# Altium PCB RPi Stepper Hat V1.1 PcbDoc.PcbDoc
Units mm, origin at the board's own origin, x right, y up, seen from the top; angles counter-clockwise.
Board outline 139 x 57 mm, 2 copper layers (Top Layer, Bottom Layer); 30 components, 21 nets, 134 pads, 22 vias.
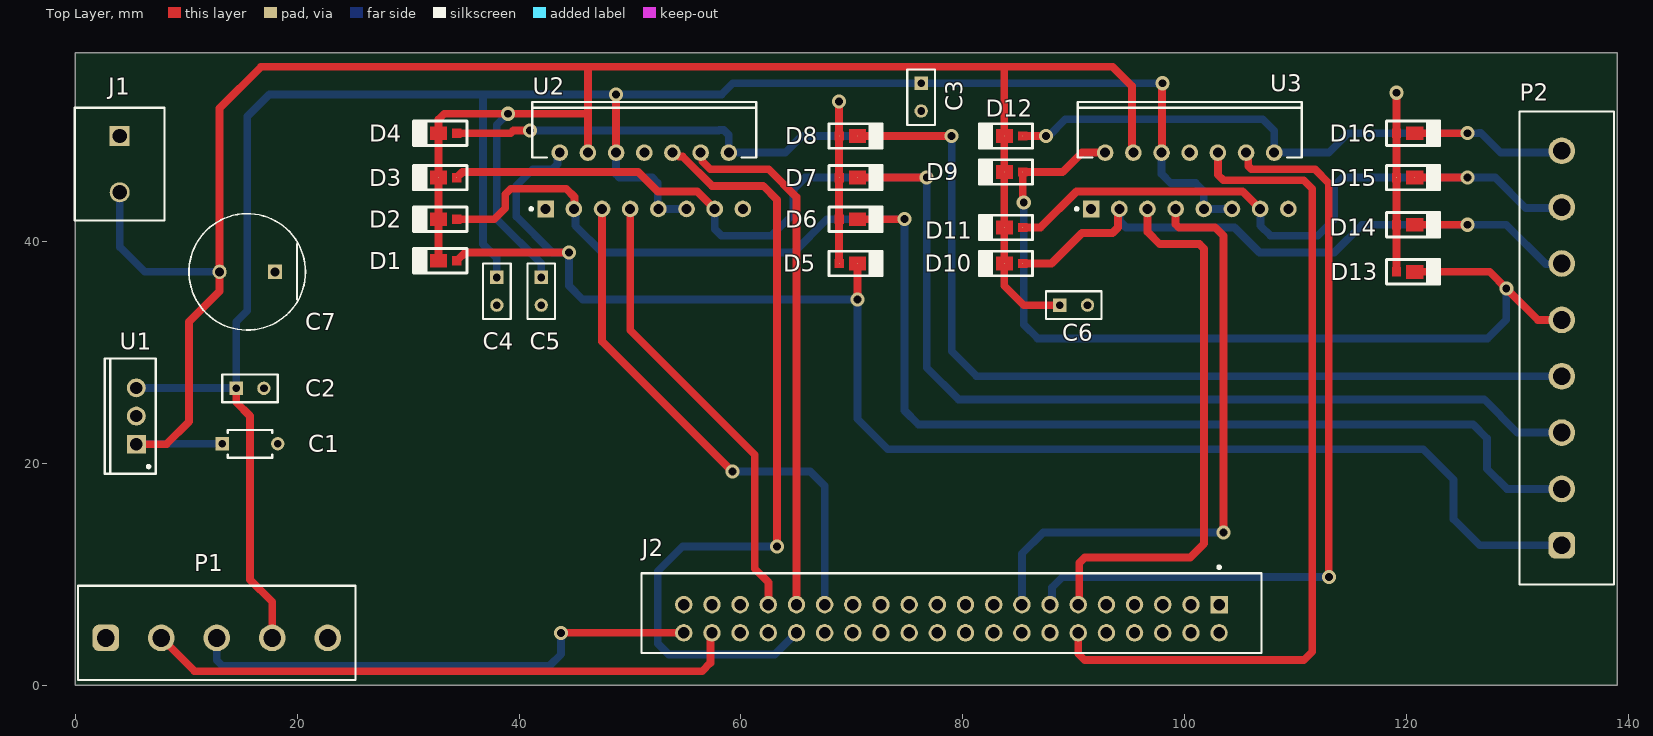
[diagram p0: Top Layer view]
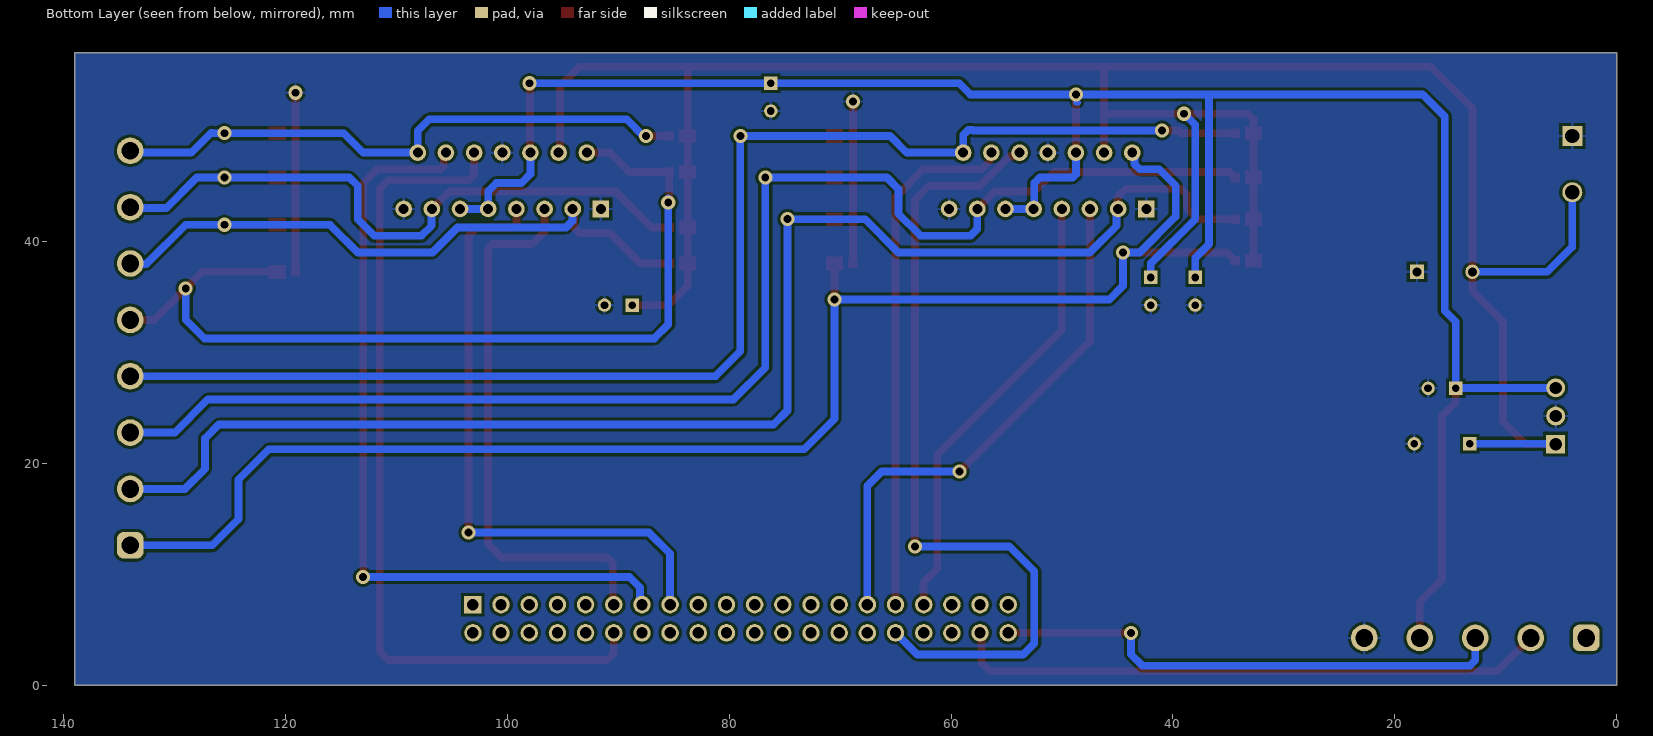
[diagram p1: Bottom Layer view, seen from below]

## Layer stack, top to bottom
Top Solder: solder mask 0.0102, Solder Resist, Dk 3.5
Top Layer: signal copper 0.0356
Dielectric 1: dielectric 0.32, FR-4, Dk 4.8
Bottom Layer: signal copper 0.0356
Bottom Solder: solder mask 0.0102, Solder Resist, Dk 3.5

## Board outline
0,0 139,0 139,57 0,57

## Design rules (kind name [scope] priority, off if disabled: settings)
Clearance [All] p1: gap=0.254 ignorepadtopadclearanceinfootprint=FALSE except(0: Arc-Hole Track-Hole SMDPad-Hole THPad-Hole Via-Hole Fill-Hole Poly-Hole Region-Hole Text-Hole)
PolygonConnect [All] p1: connectstyle=Relief reliefconductorwidth=0.254 reliefentries=4 polygonreliefangle="90 Angle" airgapwidth=0.254
RoutingVias [All] p1: holewidth=0.711 width=1.27 viastyle="Through Hole" minholewidth=0.711 minwidth=1.27 maxholewidth=0.711 maxwidth=1.27
SolderMaskExpansion [All] p1: expansion=0.102 istentingtop=FALSE
Width [All] p1: maxlimit=1 minlimit=0.3 preferedwidth=0.5
30 further rules are at their usual default settings.

## Components (designator, comment, footprint, x,y, rotation, side; value= is the part's Value field where it differs from the comment)
C1 "220n" FP-RCE1K1-2_5-MFG 15.75,21.75 r0 top
C2 "100n" FP-RDE0P1-MFG 15.75,26.75 r0 top
C3 "100n" FP-RDE0P1-MFG 76.25,53 r270 top
C4 "100n" FP-RDE0P1-MFG 38,35.5 r270 top
C5 "100n" FP-RDE0P1-MFG 42,35.5 r270 top
C6 "100n" FP-RDE0P1-MFG 90,34.25 r0 top
C7 "220u" FP-RAD-TH-D_10_0_5-L_25_2-MFG 15.5,37.25 r180 top
D1 "RFN2VWM2STR" RFN2VWM2STR 34.8,38.65 r180 top
D2 "RFN2VWM2STR" RFN2VWM2STR 34.8,42.4 r180 top
D3 "RFN2VWM2STR" RFN2VWM2STR 34.8,46.15 r180 top
D4 "RFN2VWM2STR" RFN2VWM2STR 34.8,50.15 r180 top
D5 "RFN2VWM2STR" RFN2VWM2STR 68.45,37.6 r0 top
D6 "RFN2VWM2STR" RFN2VWM2STR 68.45,41.6 r0 top
D7 "RFN2VWM2STR" RFN2VWM2STR 68.45,45.35 r0 top
D8 "RFN2VWM2STR" RFN2VWM2STR 68.45,49.1 r0 top
D9 "RFN2VWM2STR" RFN2VWM2STR 85.8,46.65 r180 top
D10 "RFN2VWM2STR" RFN2VWM2STR 85.8,38.4 r180 top
D11 "RFN2VWM2STR" RFN2VWM2STR 85.8,41.65 r180 top
D12 "RFN2VWM2STR" RFN2VWM2STR 85.8,49.9 r180 top
D13 "RFN2VWM2STR" RFN2VWM2STR 118.7,36.85 r0 top
D14 "RFN2VWM2STR" RFN2VWM2STR 118.7,41.1 r0 top
D15 "RFN2VWM2STR" RFN2VWM2STR 118.7,45.35 r0 top
D16 "RFN2VWM2STR" RFN2VWM2STR 118.7,49.35 r0 top
J1 "1729128" PHOE-1729128-2_V 4,46.96 r270 top
J2 "SFH11-PBPC-D20-ST-BK" FP-SFH11-PBPC-D20-ST-BK-MFG 78.98,6.48 r180 top
P1 "691311700005" 691311700005 12.75,4.7 r0 top
P2 "691311500108" 691311500108 134.45,30.38 r90 top
U1 "L7805CV" TO220 5.5,24.25 r90 top
U2 "L298N" STM-FM-15 51.29,45.46 r90 top
U3 "L298N" STM-FM-15 100.46,45.46 r90 top

## Footprints (in the part's own frame and the unit in brackets; to place one, negate y for a bottom-side part, rotate by r counter-clockwise, add the part's x,y. Pads: shape width x height; smd on the part's side, far side on the other; paste and mask are expansions set on the pad)
691311500108 [mm] "5,08mm - PCB Headers - Vertical - Closed ends -08p"
  rrect50% 2.4x2.4 hole 1.6: 1(-17.78,0.45)
  round 2.4 hole 1.6: 2(-12.7,0.45) 3(-7.62,0.45) 4(-2.54,0.45) 5(2.54,0.45) 6(7.62,0.45) 7(12.7,0.45) 8(17.78,0.45)
  silkscreen extent -21.32,-4.25 21.32,4.25, body extent -21.32,-4.25 21.32,4.25, height 12.05
691311700005 [mm] "5.00mm - Open Vertical PCB Header - 05p"
  rrect50% 2.4x2.4 hole 1.6: 1(-10,-0.45)
  round 2.4 hole 1.6: 2(-5,-0.45) 3(0,-0.45) 4(5,-0.45) 5(10,-0.45)
  silkscreen extent -12.5,-4.25 12.5,4.25, body extent -12.5,-4.25 12.5,4.25, height 12.1
FP-RAD-TH-D_10_0_5-L_25_2-MFG [mm]
  rect 1.3x1.3 hole 0.8 paste-1000 mask+0: 1(-2.5,0)
  round 1.3 hole 0.8 paste-1000 mask+0: 2(2.5,0)
  silkscreen extent -5.25,-5.25 5.25,5.25, body extent -5.35,-5.35 5.35,5.35, height 0.25
FP-RCE1K1-2_5-MFG [mm]
  rect 1.2x1.2 hole 0.7 paste-1000 mask+0: 1(-2.5,0)
  round 1.2 hole 0.7 paste-1000 mask+0: 2(2.5,0)
  silkscreen extent -2,-1.25 2,1.25, body extent -3.2,-1.35 3.2,1.35, height 0.25
FP-RDE0P1-MFG [mm]
  rect 1.2x1.2 hole 0.7 paste-1000 mask+0: 1(-1.25,0)
  round 1.2 hole 0.7 paste-1000 mask+0: 2(1.25,0)
  silkscreen extent -2.5,-1.25 2.5,1.25, body extent -2.6,-1.35 2.6,1.35, height 0.25
FP-SFH11-PBPC-D20-ST-BK-MFG [mm]
  rect 1.57x1.57 hole 1.02 paste-1000 mask+0: 1(-24.13,-0.77)
  round 1.57 hole 1.02 paste-1000 mask+0: 2(-24.13,1.77) 3(-21.59,-0.77) 4(-21.59,1.77) 5(-19.05,-0.77) 6(-19.05,1.77) 7(-16.51,-0.77) 8(-16.51,1.77) 9(-13.97,-0.77) 10(-13.97,1.77) 11(-11.43,-0.77) 12(-11.43,1.77) 13(-8.89,-0.77) 14(-8.89,1.77) 15(-6.35,-0.77) 16(-6.35,1.77) 17(-3.81,-0.77) 18(-3.81,1.77) 19(-1.27,-0.77) 20(-1.27,1.77) 21(1.27,-0.77) 22(1.27,1.77) 23(3.81,-0.77) 24(3.81,1.77) 25(6.35,-0.77) 26(6.35,1.77) 27(8.89,-0.77) 28(8.89,1.77) 29(11.43,-0.77) 30(11.43,1.77) 31(13.97,-0.77) 32(13.97,1.77) 33(16.51,-0.77) 34(16.51,1.77) 35(19.05,-0.77) 36(19.05,1.77) 37(21.59,-0.77) 38(21.59,1.77) 39(24.13,-0.77) 40(24.13,1.77)
  silkscreen extent -27.94,-4.27 27.94,3.6, body extent -27.86,-3.55 27.86,3.55, height 8.7
PHOE-1729128-2_V [mm] "Receptacle, 2-Leads, Body 8.1x10.16mm, Pitch 5.08mm"
  rect 1.8x1.8 hole 1.3: 1(-2.54,0)
  round 1.8 hole 1.3: 2(2.54,0)
  silkscreen extent -5.08,-4.05 5.08,4.05, body extent -5.65,-4.05 5.08,4.05, height 10.01
RFN2VWM2STR [mm]
  round 0.025 smd: A(0.4,0.4) K(2.05,0.4)
  Top Layer region: 1.3,1 1.3,-0.2 2.8,-0.2 2.8,1
  Top Layer region: 0,0.8 0.8,0.8 0.8,0 0,0
  silkscreen extent -0.5,-0.7 4.3,1.5
STM-FM-15 [mm] "FM, 15-Leads, Body 20.2x5mm, Pitch 1.27mm"
  rect 1.5x1.5 hole 0.9: 1(-2.54,8.89)
  round 1.5 hole 0.9: 2(2.54,7.62) 3(-2.54,6.35) 4(2.54,5.08) 5(-2.54,3.81) 6(2.54,2.54) 7(-2.54,1.27) 8(2.54,0) 9(-2.54,-1.27) 10(2.54,-2.54) 11(-2.54,-3.81) 12(2.54,-5.08) 13(-2.54,-6.35) 14(2.54,-7.62) 15(-2.54,-8.89)
  silkscreen extent -2.66,-10.1 7.09,10.31, body extent -2.8,-10.1 7.09,10.1, height 21
TO220 [mm] "TO, Thru-Hole, Vertical, Heatsink Mounted; 3 In-Line Leads; Pitch 2.54 mm"
  rect 1.7x1.7 hole 1.1: 1(-2.54,0)
  round 1.7 hole 1.1: 2(0,0) 3(2.54,0)
  silkscreen extent -5.2,-1.75 5.2,2.85, body extent -5.25,-1.8 5.25,2.9, height 19.7

## Part data
C1: library part CMP-06035-036150-1, "Cap Ceramic Monolithic 220nF 50V 10% Thru-Hole Bulk RCER71H224K1M1H03A", Capacitance=220nF, Case/Package=Radial, Dielectric=X7R, Max Operating Temperature=125°C, Min Operating Temperature=-55°C, Package Quantity=1, Ratings=AEC-Q200, Resistor Type=Ceramic, Tolerance=10%, Voltage Rating=50V, Height=3.5mm, Height - Seated (Max)=0.138inch, Lead Diameter=0.5mm, Lead Pitch=0.197inch, Lead/Base Style="Formed Leads", Length=0.157inch, Mount="Through Hole", Packaging="Tape and Reel", Termination=Radial, Voltage Rating (DC)=50V, Width=0.098inch
C2 C3 C4 C5 C6: library part CMP-06035-046728-1, "Ceramic Capacitor 100nF ±10% 25V X7R Radial RDER71E104K0S1H03A", Capacitance=100nF, Case/Package=Radial, Dielectric=X7R, Max Operating Temperature=125°C, Min Operating Temperature=-55°C, Package Quantity=2000, Resistor Type=Ceramic, Tolerance=10%, Voltage Rating=25V, Height=3.5mm, Height - Seated (Max)=0.236inch, Lead Diameter=0.5mm, Lead Free="Lead Free", Lead Pitch=0.098inch, Length=0.197inch, Mount="Through Hole", Packaging="Tape and Reel", Termination=Radial, Voltage Rating (DC)=25V, Width=3.5mm
C7: library part CMP-05427-000604-1, "Aluminum Electrolytic Capacitors (Radial Lead Type) 220uF ±20% 63V EEUFR1J221LB", Capacitance=220uF, Case/Package=Radial, ESR (Equivalent Series Resistance)=33mR, Max Operating Temperature=105°C, Min Operating Temperature=-40°C, Package Quantity=500, Ripple Current=1.5A, Tolerance=20%, Voltage Rating=63V, Construction=Cylindrical, Diameter=10mm, Height=25mm, Height - Seated (Max)=1.063inch, Impedance=33mR, Lead Diameter=0.6mm, Lead Free="Lead Free", Lead Pitch=5mm, Length=25mm, Life (Hours)=10000Hour, Mount="Through Hole", Packaging="Tape and Reel", Polarity=Polar, Radiation Hardening=No, REACH SVHC=Yes, RoHS Compliant=Yes, Series=FR, Termination=Radial, Voltage Rating (DC)=63V
J1: library part CMP-2000-05815-1, "PCB Terminal Block, 13.5 A, 400 V, 2-Pin THD, RoHS, Bulk", Current Rating=13500mA, Manufacturer="Phoenix Contact", Package Description="2-Pin Through Hole Device, Body 8.1 x 10.16 mm, Pitch 5.08 mm", Package Reference=1729128-2, Package Version=03/2015, Voltage Rating=400V, Datasheet URL=https://datasheet.ciiva.com/16046/1729128-16046181.pdf, Datasheet Version=12/2013, Manufacturer URL=http://www.phoenixcontact.com/, Mounting Technology=ThroughHole, No. of Positions=2, No. of Rows=1, Orientation=Horizontal, Package URL=https://www.phoenixcontact.com/online/portal/pi/pxc/product_detail_page/!ut/p/b1/3VdJjqNKFDxLH8AFycySyWY2ozFsEPOMMQaDOX1XedGL_1Vdm5YXJleknhSKeBkvI6EA8ncAo3AYoDhBQGco6KN7VURTdemj9us_IEKEZo_YHiPAEWEFmDGOHMORkqKYCORBZxgL7ZoaZYcbFFUZ3fqxSY6GOuxydWUuHqz1ynmMFygu583Bob0Ewr6Sd_l-5m-kAueHiB0jpRwZwe58wwtkpxtMYd_LmGcDRU02dRNEyWt6Y2ti5pSyJ_reIkzIulrqApdnbT11V5jnCKbYNCvhEM1MCpPByat_X379-iThf08CI5GfOPqfBeS3BRoBOdD55AKVv0iLwCMq-2BrzXWSGRH7pUGD9uwXQjiph3xL0DKQwdGa0JImiIOmBNOestqgwTHSSs2oOep-78apyXQBvNi8ZLaFjvjWvcaUEBu0MC6Wbe-d6mB0FAebo2lUWinqYaZs5DAYzV0RP9yitUjnGJ0iI9xhZkT42OCQNUJJhkgWINNQLP2JFP6OpMg3JCVg70jqHT0lvKOnhHf0lPuOnnLf0VPuWx6_dxwUIvwk5WMkT0kLL1mh61l2yZVSzG3pYV_bqo-mj6uMKwKwdnnW8Jh5RTOJzMOA5c-eJDaZQw4mTMPH02PvS_ZAqNVjVTo2WyYLkwH_KU1mmmG5kjRhDqPXLwwVHvVOjCM60-fpXvTDfMGW1PVFVS1r4e4yVDk4ZdNbkUHvqPqQSeian4UD39fNKmachqdJ1NJbyk8rXT9mXTvPk3oE5meulKGgiruPJek-4I9hTT6G8ZLOyRSm2RRVbThERQad5OS28hdt4YW4vG0stgYYzsWsK4_7y6DZMjJSCqri1kyiZR5vD7pwIrNR7QwPHTcLTI5qT7eRlpHrdGiupYlqQDJ7zy_CND8fWWBoLRXxk1RVcXiBQwbTD4Xi7KL-FuO94t9xaqweXzH, Packing=Bulk, PartNumber=1729128, Pitch=5.08mm, RoHS=TRUE
J2: library part CMP-25680-000025-1, "CONN HDR 40POS 0.1 GOLD PCB", Color=Black, Package Quantity=1, Connector Type=Header, Contact Plating=Gold, Lead Free="Lead Free", Mount="Through Hole", Number of Positions=40, Number of Rows=2, Packaging=Tray, Pitch=0.1inch, Row Spacing=0.1inch, Termination=Solder
P1: library part CMP-1502-02029-2, Color=Green, Current=20A, Voltage=300V, Connector Type="PCB, Terminal Block", Contact Gender=Male, Contact Material=Brass, Gender=Male, Height=12mm, Lead Pitch=5mm, Length=8.5mm, Mount="Through Hole", NexarPartId=18818307, Number of Contacts=5, Number of Levels=1, Number of Pins=5, Number of Positions Per Level=5, Number of Rows=1, Orientation=Vertical, Packaging=Box, Pitch=5.0038mm, REACH SVHC="No SVHC", RoHS=Compliant, Termination=Solder, Width=25mm
P2: library part CMP-1502-02152-2, Color=Green, Current=20A, Voltage=300V, Contact Gender=Male, Contact Material=Brass, Contact Plating=Tin, Current Rating=20A, Gender=Male, Height=12mm, Lead Pitch=5.08mm, Length=8.5mm, Mount="Through Hole", NexarPartId=8917752, Number of Contacts=8, Number of Levels=1, Number of Pins=8, Number of Positions Per Level=8, Number of Rows=1, Orientation=Vertical, Packaging=Box, Pitch=5.08mm, REACH SVHC="No SVHC", RoHS=Compliant, Termination=Solder, Width=42.64mm
U1: library part CMP-0244-00483-1, "Positive Voltage Regulator, 5V, 3-Pin TO-220", ComponentLink1Description="Manufacturer URL", ComponentLink1URL=http://www.st.com, ComponentLink2Description=Datasheet, ComponentLink2URL=http://www.st.com/internet/com/TECHNICAL_RESOURCES/TECHNICAL_LITERATURE/DATASHEET/CD00000444.pdf, ComponentLink3Description="Package Specification", ComponentLink3URL=http://www.st.com/internet/com/TECHNICAL_RESOURCES/TECHNICAL_LITERATURE/PACKAGE_INFORMATION/CD00004649.pdf, DatasheetVersion=16/11/2011, PackageDescription="TO, Thru-Hole, Vertical, Heatsink Mounted; 3 In-Line Leads; Pitch 2.54 mm", PackageReference=TO220, PackageVersion=ver3.0
U2 U3: library part CMP-2000-06526-1, "Dual Full-Bridge Driver, 4.8 to 46 V, -40 to 150 degC, 15-Pin FM (MW 15L), RoHS, Tube", Driver Case Style=Multiwatt, Manufacturer=STMicroelectronics, Operating Temperature Max=130°C, Operating Temperature Min=-25°C, Output Current=2A, Output Voltage=46V, Package Description="15-Pin Flange Mount, Body 5 x 19.6 mm, Pitch 1.27 mm", Package Reference=FM-15, PartNumber=L298, Supply Voltage Max=7V, Supply Voltage Min=4.5V, Automotive Qualification Standard=-, Datasheet URL=https://datasheet.ciiva.com/15109/getdatasheetpartid-50682-15109332.pdf, Datasheet Version=01/2000, Manufacturer URL=http://www.st.com/, Motor Type=FullBridge, Mounting Technology=ThroughHole, MSL=-, No. of Outputs=4Outputs, No. of Pins=15Pins, Packaging=Each, Product Range=-, SVHC=NoSVHC(17-Dec-2015)

## Via types
v1: diameter 1.27, hole 0.711, Top Layer to Bottom Layer, 22 vias

## Nets (pads, with @x,y where several pads share a name; then routed paths per layer and width w, separated by ;. In a path a pad name is that pad's centre, name@x,y a point inside that pad or via, vN(x,y) a via of type N, cw(c..) or ccw(c..) an arc to the next point about the centre after c; other vN are vias at no path point)
+5V: C2.1 C3.1 C4.1 P1.4 U1.3 U2.6 U2.9 U2.11 U3.6 U3.9 U3.11 | length 191.6
  Top Layer w0.5: U3.6 U3.6@97.96,48.04 ; v1@97.96,54.21 v1(98,54.25)
  Top Layer w0.7: C2.1 14.5,25.5 15.75,24.25 15.75,9.5 17.75,7.5 P1.4 ; U2.6 v1(48.75,53.25) ; U3.6@97.96,48.04 v1@97.96,54.21
  Bottom Layer w0.5: 48.542,52.5 48.75,52.5
  Bottom Layer w0.7: U1.3 14.46,26.79 C2.1 14.5,32.75 15.5,33.75 15.5,51.25 17.5,53.25 36.75,53.25 ; C4.1 38,38.5 36.75,39.75 36.75,53.25 ; U2.6 48.75,46.043 49.043,45.75 52,45.75 52.5,45.25 52.5,42.98 U2.9 U2.11 ; v1@97.75,54.25 78.5,54.25 75.25,54.25 59.271,54.25 58.271,53.25 v1(48.75,53.25) 36.75,53.25 ; U3.6@98,48.08 U3.6 97.92,46.08 98.75,45.25 101,45.25 101.73,44.52 U3.9 U3.11
GND: C1.2 C2.2 C3.2 C4.2 C5.2 C6.2 C7.1 D5.A D6.A D7.A D8.A D13.A D14.A D15.A D16.A J1.1 P1.5 U1.2 U2.1 U2.8 U2.15 U3.1 U3.8 U3.15 | length 30.8
  Top Layer w0.5: J1.1 J1.1@4.04,49.46
  Top Layer w0.7: D5.A D6.A D7.A D8.A v1(68.85,52.6) ; D13.A D15.A D16.A v1(119.1,53.4)
"IN 1 A": J2.29 U2.5 | length 48.1
  Top Layer w0.7: U2.5 47.48,30.978 59.208,19.25 v1(59.25,19.25)
  Bottom Layer w0.7: v1(59.25,19.25) 66.25,19.25 67.55,17.95 J2.29
"IN 1 B": J2.11 U3.5 | length 50.1
  Top Layer w0.7: J2.11 90.5,7.34 90.5,11 91,11.5 100.5,11.5 101.75,12.75 101.75,39.34 101.34,39.75 97.75,39.75 96.65,40.85 U3.5
"IN 2 A": J2.33 U2.7 | length 40.9
  Top Layer w0.7: U2.7 50.02,31.98 61.25,20.75 61.25,10.5 62.5,9.25 62.5,7.28 J2.33
"IN 2 B": J2.15 U3.7 | length 56.4
  Top Layer w0.7: U3.7 99.19,41.543 99.483,41.25 102.75,41.25 103.5,40.5 v1(103.5,13.75)
  Bottom Layer w0.7: J2.15 85.33,11.83 87.25,13.75 v1(103.5,13.75)
"IN 3 A": J2.32 U2.10 | length 74.3
  Top Layer w0.7: U2.10 54.046,48 54.409,47.637 54.764,47.637 57.401,45 62,45 63.25,43.75 v1(63.25,12.5)
  Bottom Layer w0.7: v1(63.25,12.5) 54.75,12.5 52.5,10.25 52.5,3.75 53.5,2.75 63.05,2.75 J2.32
"IN 3 B": J2.12 U3.10 | length 76.3
  Top Layer w0.7: J2.12 90.41,2.84 91,2.25 110.75,2.25 111.5,3 111.5,44.75 110.75,45.5 103.5,45.5 103,46 U3.10
"IN 4 A": J2.31 U2.12 | length 47.4
  Top Layer w0.7: U2.12 56.523,47.847 56.523,47.227 57.25,46.5 62.5,46.5 65.01,43.99 J2.31
"IN 4 B": J2.13 U3.12 | length 71.7
  Top Layer w0.7: U3.12 105.731,47.809 105.731,46.793 106.024,46.5 111.75,46.5 113,45.25 v1(113,9.75)
  Bottom Layer w0.7: J2.13 88.035,7.415 88.035,8.785 89,9.75 v1(113,9.75)
"OptoInterrupt 1": J2.38 P1.2 | length 53.8
  Top Layer w0.7: P1.2 10.75,1.25 56.5,1.25 57.25,2 57.25,4.57 J2.38
"OptoInterrupt 2": J2.40 P1.3 | length 46.7
  Top Layer w0.7: v1(43.79,4.71) J2.40
  Bottom Layer w0.7: P1.3 12.75,2.25 13.25,1.75 42.75,1.75 43.79,2.79 v1(43.79,4.71)
"OUT 1 A": D1.A D5.K P2.1 U2.2 | length 139
  Top Layer w0.7: D1.A 35.15,39 v1(44.5,39) v1@44.75,39 ; v1(70.5,34.75) D5.K
  Bottom Layer w0.7: U2.2 43.479,47.809 43.479,46.979 43,46.5 41.25,46.5 39.75,45 39.75,42.25 43,39 v1(44.5,39) 44.5,36 45.75,34.75 v1(70.5,34.75) 70.5,24 73.25,21.25 121.5,21.25 124.25,18.5 124.25,14.95 126.6,12.6 P2.1
"OUT 1 B": D9.A D13.K P2.5 U3.2 | length 84.9
  Top Layer w0.7: v1(85.5,43.5) 85.4,43.6 D9.A 89,46.25 90.75,48 U3.2 ; D13.K 127.5,37.25 v1(129,35.75) 131.83,32.92 P2.5
  Bottom Layer w0.7: v1@85.5,43.858 85.5,32.5 86.75,31.25 127.316,31.25 129,32.934 v1(129,35.75)
"OUT 2 A": D2.A D6.K P2.2 U2.3 | length 132.7
  Top Layer w0.7: 34.35,42.05 ccw(c34.4,42.05) D2.A 37.75,42 38.75,43 38.75,44.25 39.25,44.75 44.25,44.75 45,44 45,42.98 U2.3 ; D6.K v1(74.75,42)
  Bottom Layer w0.7: U2.3 45.08,42.78 45.08,41.42 47.5,39 64.75,39 67.75,42 v1(74.75,42) 74.75,24.75 76,23.5 126,23.5 127.25,22.25 127.25,19.5 129.07,17.68 P2.2
"OUT 2 B": D10.A D14.K P2.6 U3.3 | length 61.1
  Top Layer w0.7: D10.A 88,38 90.75,40.75 93.5,40.75 94,41.25 94,42.81 U3.3 ; D14.K v1(125.5,41.5)
  Bottom Layer w0.7: U3.3 94.141,42.889 94.141,41.829 94.72,41.25 104.5,41.25 106.75,39 113.5,39 116,41.5 v1(125.5,41.5) 129,41.5 132.546,37.954 133.954,37.954 P2.6
"OUT 3 A": D3.A D7.K P2.3 U2.13 | length 132.5
  Top Layer w0.7: D3.A 34.9,46.25 50.75,46.25 52.5,44.5 56.06,44.5 U2.13 ; D7.K v1(76.75,45.75)
  Bottom Layer w0.7: U2.13 57.64,41.11 58.25,40.5 62.75,40.5 64.75,42.5 64.75,44.722 65.778,45.75 v1(76.75,45.75) 76.75,28.621 79.621,25.75 127,25.75 129.99,22.76 P2.3
"OUT 3 B": D11.A D15.K P2.7 U3.13 | length 62.3
  Top Layer w0.7: D11.A 87,41.25 90.25,44.5 105.23,44.5 U3.13 ; D15.K v1(125.5,45.75)
  Bottom Layer w0.7: U3.13 106.83,42.9 106.83,41.42 107.75,40.5 112,40.5 113.5,42 113.5,45 114.25,45.75 v1(125.5,45.75) 128,45.75 130.75,43 133.92,43 P2.7
"OUT 4 A": D4.A D8.K P2.4 U2.14 | length 130.7
  Top Layer w0.7: D4.A 39.25,49.75 39.5,50 v1(41,50) ; D8.K v1(79,49.5)
  Bottom Layer w0.7: v1@41.25,50 58,50 58.043,50.043 58.457,50.043 58.91,49.59 U2.14 64,48 65.5,49.5 v1(79,49.5) 79,30.09 81.25,27.84 P2.4
"OUT 4 B": D12.A D16.K P2.8 U3.14 | length 57.7
  Top Layer w0.7: D12.A v1(87.5,49.5) ; D16.K v1(125.5,49.75)
  Bottom Layer w0.7: v1@87.75,49.5 89.25,51 107.052,51 108.08,49.972 U3.14 113,48 114.75,49.75 v1(125.5,49.75) 126.5,49.75 126.543,49.793 126.707,49.793 128.5,48 133.84,48 P2.8
VCC: C1.1 C5.1 C6.1 C7.2 D1.K D2.K D3.K D4.K D9.K D10.K D11.K D12.K J1.2 U1.1 U2.4 U3.4 | length 224.7
  Top Layer w0.7: U1.1 8.21,21.71 10.25,23.75 10.25,32.75 13,35.5 C7.2 13,52 16.75,55.75 46.25,55.75 ; D1.K D2.K D3.K D4.K 32.75,51 33.25,51.5 v1(39,51.5) 46.21,51.5 ; U2.4 46.21,51.5 ; C6.1 85.5,34.25 83.75,36 D10.K D11.K D9.K D12.K 83.75,55.75 ; U3.4 95.25,48.13 95.25,54 93.5,55.75 83.75,55.75 ; 46.21,51.5 46.21,55.71 46.25,55.75 ; 46.25,55.75 83.75,55.75
  Bottom Layer w0.5: U1.1 U1.1@5.54,21.75
  Bottom Layer w0.7: J1.2 4,39.5 6.25,37.25 C7.2 ; U1.1@5.54,21.75 C1.1 ; v1(39,51.5) 38,50.5 38,42 42,38 C5.1
pads on no net: J2.1 J2.2 J2.3 J2.4 J2.5 J2.6 J2.7 J2.8 J2.9 J2.10 J2.14 J2.16 J2.17 J2.18 J2.19 J2.20 J2.21 J2.22 J2.23 J2.24 J2.25 J2.26 J2.27 J2.28 J2.30 J2.34 J2.35 J2.36 J2.37 J2.39 P1.1

## Polygon pours and split planes (outlines as drawn)
GND on Bottom Layer "GND_L02_P000" (solid, pour order 0): 0,0 0,57 139,57 139,0